# Altium PCB DAF DIP-4 PCB.PcbDoc
Units mm, origin at the board's own origin, x right, y up, seen from the top; angles counter-clockwise.
Board outline 89.92 x 39.31 mm, 2 copper layers (Top Layer, Bottom Layer); 58 components, 46 nets, 241 pads, 56 vias.
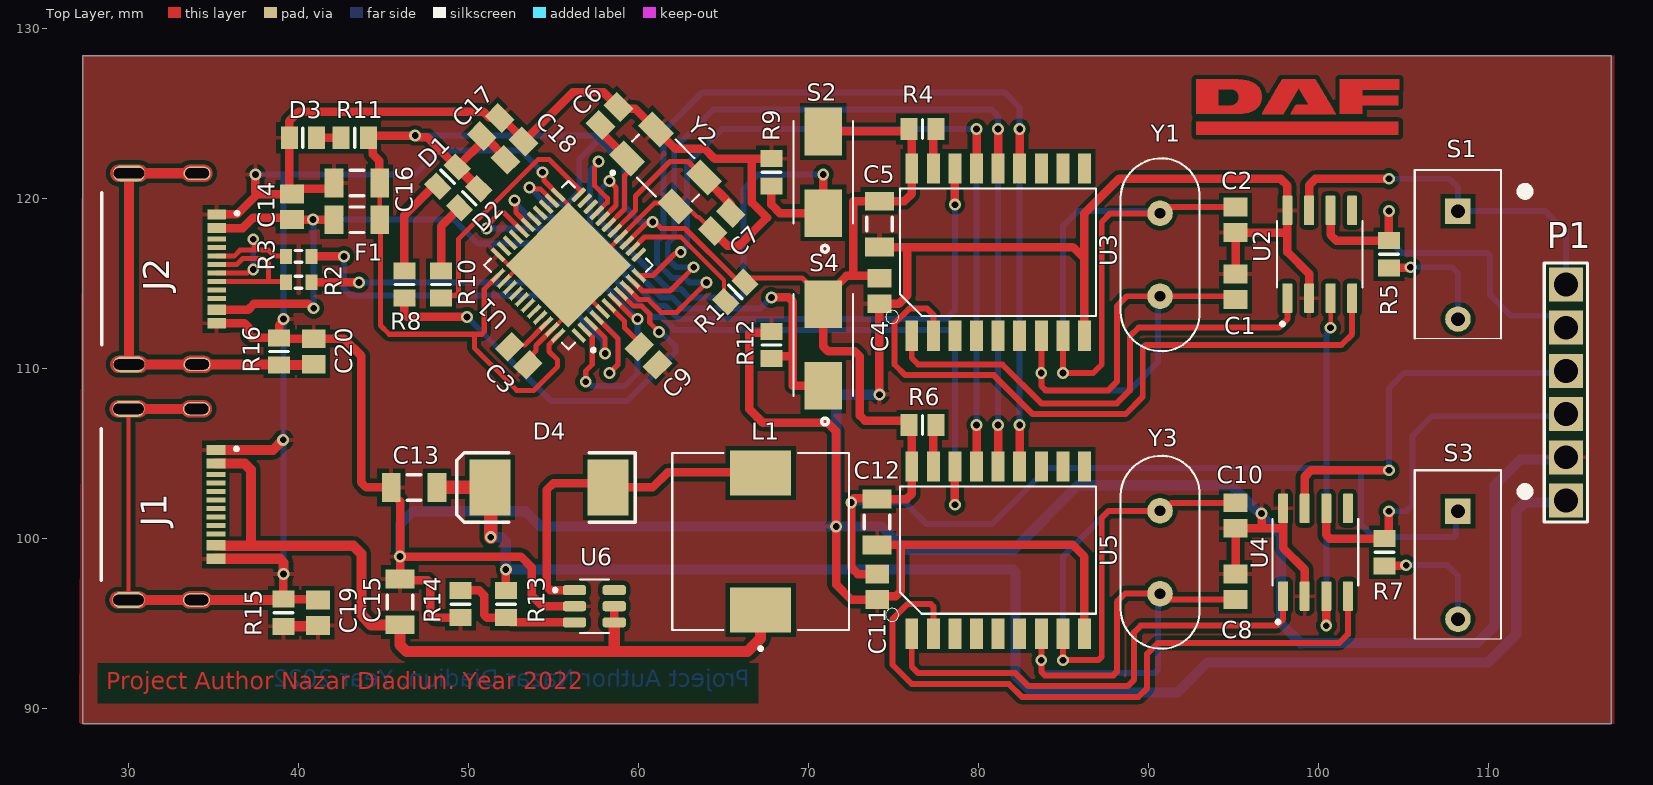
[diagram p0: Top Layer view]
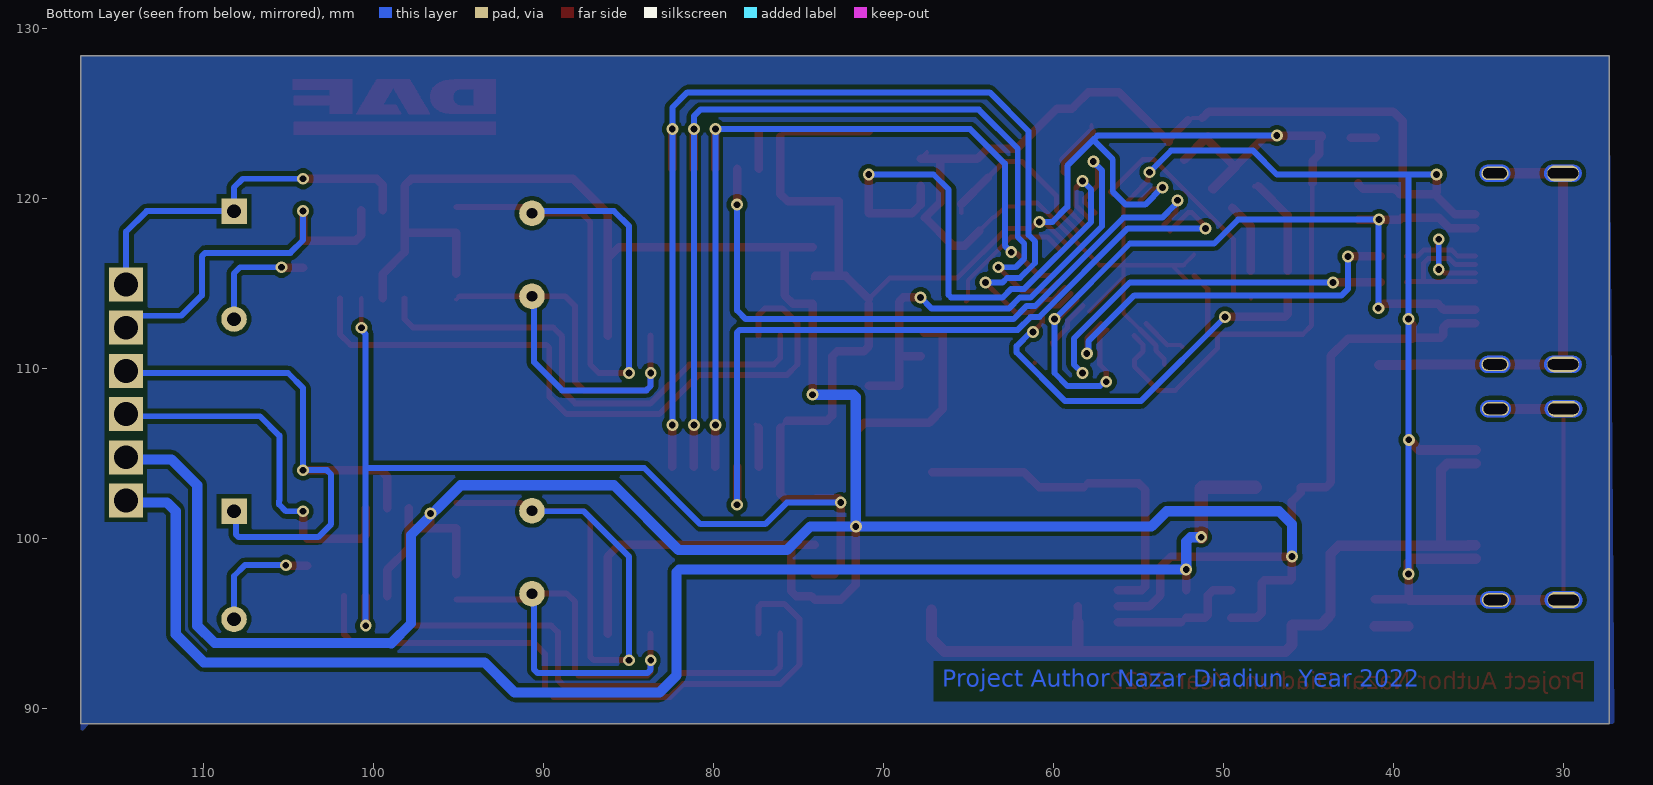
[diagram p1: Bottom Layer view, seen from below]

## Layer stack, top to bottom
Top Solder: solder mask 0.0102, Solder Resist, Dk 3.5
Top Layer: signal copper 0.0356
Dielectric 1: dielectric 0.32, FR-4, Dk 4.8
Bottom Layer: signal copper 0.0356
Bottom Solder: solder mask 0.0102, Solder Resist, Dk 3.5

## Board outline
27.305,89.09 117.221,89.09 117.221,128.397 27.305,128.397

## Design rules (kind name [scope] priority, off if disabled: settings)
Clearance [All] p1: gap=0.254 ignorepadtopadclearanceinfootprint=FALSE except(0: Arc-Hole Track-Hole SMDPad-Hole THPad-Hole Via-Hole Fill-Hole Poly-Hole Region-Hole Text-Hole)
PolygonConnect [All] p1: connectstyle=Relief reliefconductorwidth=0.254 reliefentries=4 polygonreliefangle="90 Angle" airgapwidth=0.254
RoomDefinition Schematic [InComponentClass('Schematic')] p1: confinementstyle=ConfineIn formatcopy=TRUE lockcomponents=FALSE outline 0,0 50.8,0 50.8,25.4 0,25.4
RoutingVias [All] p1: holewidth=0.711 width=1.27 viastyle="Through Hole" minholewidth=0.711 minwidth=1.27 maxholewidth=0.711 maxwidth=1.27
SolderMaskExpansion [All] p1: expansion=0.102 istentingtop=FALSE
Width [All] p1: maxlimit=0.254 minlimit=0.254 preferedwidth=0.254
30 further rules are at their usual default settings.

## Components (designator, comment, footprint, x,y, rotation, side; value= is the part's Value field where it differs from the comment)
C1 "Cap" C0805 95.123,114.808 r270 top value=20pF
C2 "Cap" C0805 95.123,118.745 r90 top value=20pF
C3 "Cap" C0805 52.959,110.744 r135 top value=100nF
C4 "Cap" C0805 74.168,114.554 r270 top value=100nF
C5 "Cap Pol3" C1206 74.168,118.491 r270 top value=10uF
C6 "Cap" C0805 58.293,124.841 r225 top value=20pF
C7 "Cap" C0805 64.897,118.618 r45 top value=20pF
C8 "Cap" C0805 95.123,97.155 r270 top value=20pF
C9 "Cap" C0805 60.579,110.744 r135 top value=1uF
C10 "Cap" C0805 95.123,101.346 r90 top value=20pF
C11 "Cap" C0805 74.041,97.155 r270 top value=100nF
C12 "Cap Pol3" C1206 74.041,100.965 r270 top value=10uF
C13 "Cap" C1206 46.8,103 r0 top value=22uF
C14 "Cap" C0805 39.624,119.507 r270 top value=1uF
C15 "Cap" C1206 45.974,96.266 r270 top value=22uF
C16 "Cap Pol3" C1206 43.434,120.904 r180 top value=10uF
C17 "Cap" C0805 51.308,124.206 r225 top value=1uF
C18 "Cap" C0805 52.705,122.809 r225 top value=100nF
C19 "Cap" C0805 41.148,95.631 r270 top value=100nF
C20 "Cap" C0805 40.894,110.998 r90 top value=100nF
D1 "TX LED" 6-0805_L 48.768,121.285 r45 top
D2 "RX LED" 6-0805_L 50.038,120.015 r45 top
D3 "Power LED" 6-0805_L 40.259,123.571 r180 top
D4 "SS34" SMC 54.737,102.997 r180 top
F1 "500mA" C1206 43.434,118.745 r0 top
J1 "USB Power-only" GCT_USB4505-03-0-A_REVA 30,102 r270 top
J2 "USB 2.0" GCT_USB4505-03-0-A_REVA 30.036,115.856 r270 top
L1 "Inductor" IND_#B966BS-220M=P3 67.183,99.822 r90 top value=22uH
P1 "DAF DIP-4 Connector" HDR1X6 114.554,102.235 r90 top
R1 "Res3" 6-0805_L 65.7,114.5 r225 top value=10k
R2 "Res3" J1-0603 40.005,115.062 r180 top value=22
R3 "Res3" J1-0603 40.005,116.586 r180 top value=22
R4 "Res3" 6-0805_L 76.708,124.079 r0 top value=10k
R5 "Res3" 6-0805_L 104.14,116.713 r270 top value=120
R6 "Res3" 6-0805_L 76.708,106.68 r0 top value=10k
R7 "Res3" 6-0805_L 103.886,99.187 r270 top value=120
R8 "Res3" 6-0805_L 46.228,114.935 r90 top value=330
R9 "Res3" 6-0805_L 67.818,121.539 r270 top value=10k
R10 "Res3" 6-0805_L 48.387,114.935 r90 top value=330
R11 "Res3" 6-0805_L 43.307,123.571 r180 top value=330
R12 "Res3" 6-0805_L 67.818,111.379 r270 top value=10k
R13 "Res3" 6-0805_L 52.197,96.139 r270 top value=47k
R14 "Res3" 6-0805_L 49.53,96.139 r270 top value=1.2k
R15 "Res3" 6-0805_L 39.116,95.631 r90 top value=1M
R16 "Res3" 6-0805_L 38.862,110.998 r270 top value=1M
S1 "Terminating 120Ohm" SW_5161390-1 108.204,116.713 r180 top
S2 "SW-PB" SW_147873-2 70.866,121.539 r90 top
S3 "Terminating 120Ohm" SW_5161390-1 108.204,99.06 r180 top
S4 "SW-PB" SW_147873-2 70.866,111.379 r90 top
U1 "ATMEGA32U4-MU" QFN50P700X700X100-45N 55.88,116.078 r135 top
U2 "TJA1050" SOIC127P600X175-8N 100.076,116.713 r90 top
U3 "MCP2515" SOIC18-1.27-11.5X7.5MM 81.153,116.84 r0 top
U4 "TJA1050" SOIC127P600X175-8N 99.822,99.187 r90 top
U5 "MCP2515" SOIC18-1.27-11.5X7.5MM 81.153,99.314 r0 top
U6 "MT3608" SOT95P280X145-6N 57.404,96.012 r0 top
Y1 "8MHz" XTAL_ECS-135-S-1 90.678,116.686 r90 top
Y2 "16MHz" OSC_ABM3B-16.000MHZ-D-1-X-T 61.595,121.793 r45 top
Y3 "8MHz" XTAL_ECS-135-S-1 90.678,99.187 r90 top

## Footprints (in the part's own frame and the unit in brackets; to place one, negate y for a bottom-side part, rotate by r counter-clockwise, add the part's x,y. Pads: shape width x height; smd on the part's side, far side on the other; paste and mask are expansions set on the pad)
6-0805_L [mm] "Chip Resistor, Body 2.0x1.2mm, IPC High Density"
  rect 1x1.3 smd: 1(-0.8,0) 2(0.8,0)
  silkscreen extent 0,-0.55 0,0.55, body extent -1.07,-0.7 1.07,0.7, height 0.7
C0805 [mm] "Chip Capacitor, Body 2.0x1.3mm, IPC High Density"
  rect 1.1x1.4 smd: 1(-0.75,0) 2(0.75,0)
  body extent -1.1,-0.72 1.1,0.72, height 1.4
C1206 [mm] "Chip Capacitor, Body 3.2x1.6mm, IPC High Density"
  rect 1.1x1.7 smd: 1(-1.35,0) 2(1.35,0)
  silkscreen extent -0.4,-0.75 0.4,0.75, body extent -1.7,-0.9 1.7,0.9, height 1.3
GCT_USB4505-03-0-A_REVA [mm]
  rect 0.6x1.1 smd: A1_B12(-3.2,5.15) A4_B9(-2.4,5.15) B1_A12(3.2,5.15) B4_A9(2.4,5.15)
  rect 0.3x1.1 smd: A5(-1.25,5.15) A6(-0.25,5.15) A7(0.25,5.15) A8(1.25,5.15) B5(1.75,5.15) B6(0.75,5.15) B7(-0.75,5.15) B8(-1.75,5.15)
  oval 0.95x1.9 hole 0.6 slot 1.8 at 90 deg mask+0: S1(-5.62,0) S4(5.62,0)
  oval 0.8x1.6 hole 0.6 slot 1.4 at 90 deg mask+0: S2(5.62,4) S3(-5.62,4)
  Top Layer region: -5.594,4.899 -5.568,4.897 -5.542,4.894 -5.516,4.889 -5.491,4.883 -5.465,4.876 -5.441,4.867 -5.417,4.857 -5.393,4.846 -5.37,4.833 -5.348,4.819 -5.326,4.805 -5.305,4.789 -5.285,4.772 -5.266,4.754 -5.248,4.735 -5.231,4.715 -5.215,4.694 -5.201,4.672 -5.187,4.65 -5.174,4.627 -5.163,4.603 -5.153,4.579 -5.144,4.555 -5.137,4.529 -5.131,4.504 -5.126,4.478 -5.123,4.452 -5.121,4.426 -5.12,4.4 -5.12,3.6 -5.121,3.574 -5.123,3.548 -5.126,3.522 -5.131,3.496 -5.137,3.471 -5.144,3.445 -5.153,3.421 -5.163,3.397 -5.174,3.373 -5.187,3.35 -5.201,3.328 -5.215,3.306 -5.231,3.285 -5.248,3.265 -5.266,3.246 -5.285,3.228 -5.305,3.211 -5.326,3.195 -5.348,3.181 -5.37,3.167 -5.393,3.154 -5.417,3.143 -5.441,3.133 -5.465,3.124 -5.491,3.117 -5.516,3.111 -5.542,3.106 -5.568,3.103 -5.594,3.101 -5.62,3.1 -5.646,3.101 -5.672,3.103 -5.698,3.106 -5.724,3.111 -5.749,3.117 -5.775,3.124 -5.799,3.133 -5.823,3.143 -5.847,3.154 -5.87,3.167 -5.892,3.181 -5.914,3.195 -5.935,3.211 -5.955,3.228 -5.974,3.246 -5.992,3.265 -6.009,3.285 -6.025,3.306 -6.039,3.328 -6.053,3.35 -6.066,3.373 -6.077,3.397 -6.087,3.421 -6.096,3.445 -6.103,3.471 -6.109,3.496 -6.114,3.522 -6.117,3.548 -6.119,3.574 -6.12,3.6 -6.12,4.4 -6.119,4.426 -6.117,4.452 -6.114,4.478 -6.109,4.504 -6.103,4.529 -6.096,4.555 -6.087,4.579 -6.077,4.603 -6.066,4.627 -6.053,4.65 -6.039,4.672 -6.025,4.694 -6.009,4.715 -5.992,4.735 -5.974,4.754 -5.955,4.772 -5.935,4.789 -5.914,4.805 -5.892,4.819 -5.87,4.833 -5.847,4.846 -5.823,4.857 -5.799,4.867 -5.775,4.876 -5.749,4.883 -5.724,4.889 -5.698,4.894 -5.672,4.897 -5.646,4.899 -5.62,4.9
  Top Layer region: 5.646,4.899 5.672,4.897 5.698,4.894 5.724,4.889 5.749,4.883 5.775,4.876 5.799,4.867 5.823,4.857 5.847,4.846 5.87,4.833 5.892,4.819 5.914,4.805 5.935,4.789 5.955,4.772 5.974,4.754 5.992,4.735 6.009,4.715 6.025,4.694 6.039,4.672 6.053,4.65 6.066,4.627 6.077,4.603 6.087,4.579 6.096,4.555 6.103,4.529 6.109,4.504 6.114,4.478 6.117,4.452 6.119,4.426 6.12,4.4 6.12,3.6 6.119,3.574 6.117,3.548 6.114,3.522 6.109,3.496 6.103,3.471 6.096,3.445 6.087,3.421 6.077,3.397 6.066,3.373 6.053,3.35 6.039,3.328 6.025,3.306 6.009,3.285 5.992,3.265 5.974,3.246 5.955,3.228 5.935,3.211 5.914,3.195 5.892,3.181 5.87,3.167 5.847,3.154 5.823,3.143 5.799,3.133 5.775,3.124 5.749,3.117 5.724,3.111 5.698,3.106 5.672,3.103 5.646,3.101 5.62,3.1 5.594,3.101 5.568,3.103 5.542,3.106 5.516,3.111 5.491,3.117 5.465,3.124 5.441,3.133 5.417,3.143 5.393,3.154 5.37,3.167 5.348,3.181 5.326,3.195 5.305,3.211 5.285,3.228 5.266,3.246 5.248,3.265 5.231,3.285 5.215,3.306 5.201,3.328 5.187,3.35 5.174,3.373 5.163,3.397 5.153,3.421 5.144,3.445 5.137,3.471 5.131,3.496 5.126,3.522 5.123,3.548 5.121,3.574 5.12,3.6 5.12,4.4 5.121,4.426 5.123,4.452 5.126,4.478 5.131,4.504 5.137,4.529 5.144,4.555 5.153,4.579 5.163,4.603 5.174,4.627 5.187,4.65 5.201,4.672 5.215,4.694 5.231,4.715 5.248,4.735 5.266,4.754 5.285,4.772 5.305,4.789 5.326,4.805 5.348,4.819 5.37,4.833 5.393,4.846 5.417,4.857 5.441,4.867 5.465,4.876 5.491,4.883 5.516,4.889 5.542,4.894 5.568,4.897 5.594,4.899 5.62,4.9
  Top Layer region: -5.594,1.099 -5.568,1.097 -5.542,1.094 -5.516,1.089 -5.491,1.083 -5.465,1.076 -5.441,1.067 -5.417,1.057 -5.393,1.046 -5.37,1.033 -5.348,1.019 -5.326,1.005 -5.305,0.989 -5.285,0.972 -5.266,0.954 -5.248,0.935 -5.231,0.915 -5.215,0.894 -5.201,0.872 -5.187,0.85 -5.174,0.827 -5.163,0.803 -5.153,0.779 -5.144,0.755 -5.137,0.729 -5.131,0.704 -5.126,0.678 -5.123,0.652 -5.121,0.626 -5.12,0.6 -5.12,-0.6 -5.121,-0.626 -5.123,-0.652 -5.126,-0.678 -5.131,-0.704 -5.137,-0.729 -5.144,-0.755 -5.153,-0.779 -5.163,-0.803 -5.174,-0.827 -5.187,-0.85 -5.201,-0.872 -5.215,-0.894 -5.231,-0.915 -5.248,-0.935 -5.266,-0.954 -5.285,-0.972 -5.305,-0.989 -5.326,-1.005 -5.348,-1.019 -5.37,-1.033 -5.393,-1.046 -5.417,-1.057 -5.441,-1.067 -5.465,-1.076 -5.491,-1.083 -5.516,-1.089 -5.542,-1.094 -5.568,-1.097 -5.594,-1.099 -5.62,-1.1 -5.646,-1.099 -5.672,-1.097 -5.698,-1.094 -5.724,-1.089 -5.749,-1.083 -5.775,-1.076 -5.799,-1.067 -5.823,-1.057 -5.847,-1.046 -5.87,-1.033 -5.892,-1.019 -5.914,-1.005 -5.935,-0.989 -5.955,-0.972 -5.974,-0.954 -5.992,-0.935 -6.009,-0.915 -6.025,-0.894 -6.039,-0.872 -6.053,-0.85 -6.066,-0.827 -6.077,-0.803 -6.087,-0.779 -6.096,-0.755 -6.103,-0.729 -6.109,-0.704 -6.114,-0.678 -6.117,-0.652 -6.119,-0.626 -6.12,-0.6 -6.12,0.6 -6.119,0.626 -6.117,0.652 -6.114,0.678 -6.109,0.704 -6.103,0.729 -6.096,0.755 -6.087,0.779 -6.077,0.803 -6.066,0.827 -6.053,0.85 -6.039,0.872 -6.025,0.894 -6.009,0.915 -5.992,0.935 -5.974,0.954 -5.955,0.972 -5.935,0.989 -5.914,1.005 -5.892,1.019 -5.87,1.033 -5.847,1.046 -5.823,1.057 -5.799,1.067 -5.775,1.076 -5.749,1.083 -5.724,1.089 -5.698,1.094 -5.672,1.097 -5.646,1.099 -5.62,1.1
  Top Layer region: 5.646,1.099 5.672,1.097 5.698,1.094 5.724,1.089 5.749,1.083 5.775,1.076 5.799,1.067 5.823,1.057 5.847,1.046 5.87,1.033 5.892,1.019 5.914,1.005 5.935,0.989 5.955,0.972 5.974,0.954 5.992,0.935 6.009,0.915 6.025,0.894 6.039,0.872 6.053,0.85 6.066,0.827 6.077,0.803 6.087,0.779 6.096,0.755 6.103,0.729 6.109,0.704 6.114,0.678 6.117,0.652 6.119,0.626 6.12,0.6 6.12,-0.6 6.119,-0.626 6.117,-0.652 6.114,-0.678 6.109,-0.704 6.103,-0.729 6.096,-0.755 6.087,-0.779 6.077,-0.803 6.066,-0.827 6.053,-0.85 6.039,-0.872 6.025,-0.894 6.009,-0.915 5.992,-0.935 5.974,-0.954 5.955,-0.972 5.935,-0.989 5.914,-1.005 5.892,-1.019 5.87,-1.033 5.847,-1.046 5.823,-1.057 5.799,-1.067 5.775,-1.076 5.749,-1.083 5.724,-1.089 5.698,-1.094 5.672,-1.097 5.646,-1.099 5.62,-1.1 5.594,-1.099 5.568,-1.097 5.542,-1.094 5.516,-1.089 5.491,-1.083 5.465,-1.076 5.441,-1.067 5.417,-1.057 5.393,-1.046 5.37,-1.033 5.348,-1.019 5.326,-1.005 5.305,-0.989 5.285,-0.972 5.266,-0.954 5.248,-0.935 5.231,-0.915 5.215,-0.894 5.201,-0.872 5.187,-0.85 5.174,-0.827 5.163,-0.803 5.153,-0.779 5.144,-0.755 5.137,-0.729 5.131,-0.704 5.126,-0.678 5.123,-0.652 5.121,-0.626 5.12,-0.6 5.12,0.6 5.121,0.626 5.123,0.652 5.126,0.678 5.131,0.704 5.137,0.729 5.144,0.755 5.153,0.779 5.163,0.803 5.174,0.827 5.187,0.85 5.201,0.872 5.215,0.894 5.231,0.915 5.248,0.935 5.266,0.954 5.285,0.972 5.305,0.989 5.326,1.005 5.348,1.019 5.37,1.033 5.393,1.046 5.417,1.057 5.441,1.067 5.465,1.076 5.491,1.083 5.516,1.089 5.542,1.094 5.568,1.097 5.594,1.099 5.62,1.1
  Bottom Layer region: -5.594,4.899 -5.568,4.897 -5.542,4.894 -5.516,4.889 -5.491,4.883 -5.465,4.876 -5.441,4.867 -5.417,4.857 -5.393,4.846 -5.37,4.833 -5.348,4.819 -5.326,4.805 -5.305,4.789 -5.285,4.772 -5.266,4.754 -5.248,4.735 -5.231,4.715 -5.215,4.694 -5.201,4.672 -5.187,4.65 -5.174,4.627 -5.163,4.603 -5.153,4.579 -5.144,4.555 -5.137,4.529 -5.131,4.504 -5.126,4.478 -5.123,4.452 -5.121,4.426 -5.12,4.4 -5.12,3.6 -5.121,3.574 -5.123,3.548 -5.126,3.522 -5.131,3.496 -5.137,3.471 -5.144,3.445 -5.153,3.421 -5.163,3.397 -5.174,3.373 -5.187,3.35 -5.201,3.328 -5.215,3.306 -5.231,3.285 -5.248,3.265 -5.266,3.246 -5.285,3.228 -5.305,3.211 -5.326,3.195 -5.348,3.181 -5.37,3.167 -5.393,3.154 -5.417,3.143 -5.441,3.133 -5.465,3.124 -5.491,3.117 -5.516,3.111 -5.542,3.106 -5.568,3.103 -5.594,3.101 -5.62,3.1 -5.646,3.101 -5.672,3.103 -5.698,3.106 -5.724,3.111 -5.749,3.117 -5.775,3.124 -5.799,3.133 -5.823,3.143 -5.847,3.154 -5.87,3.167 -5.892,3.181 -5.914,3.195 -5.935,3.211 -5.955,3.228 -5.974,3.246 -5.992,3.265 -6.009,3.285 -6.025,3.306 -6.039,3.328 -6.053,3.35 -6.066,3.373 -6.077,3.397 -6.087,3.421 -6.096,3.445 -6.103,3.471 -6.109,3.496 -6.114,3.522 -6.117,3.548 -6.119,3.574 -6.12,3.6 -6.12,4.4 -6.119,4.426 -6.117,4.452 -6.114,4.478 -6.109,4.504 -6.103,4.529 -6.096,4.555 -6.087,4.579 -6.077,4.603 -6.066,4.627 -6.053,4.65 -6.039,4.672 -6.025,4.694 -6.009,4.715 -5.992,4.735 -5.974,4.754 -5.955,4.772 -5.935,4.789 -5.914,4.805 -5.892,4.819 -5.87,4.833 -5.847,4.846 -5.823,4.857 -5.799,4.867 -5.775,4.876 -5.749,4.883 -5.724,4.889 -5.698,4.894 -5.672,4.897 -5.646,4.899 -5.62,4.9
  Bottom Layer region: 5.646,4.899 5.672,4.897 5.698,4.894 5.724,4.889 5.749,4.883 5.775,4.876 5.799,4.867 5.823,4.857 5.847,4.846 5.87,4.833 5.892,4.819 5.914,4.805 5.935,4.789 5.955,4.772 5.974,4.754 5.992,4.735 6.009,4.715 6.025,4.694 6.039,4.672 6.053,4.65 6.066,4.627 6.077,4.603 6.087,4.579 6.096,4.555 6.103,4.529 6.109,4.504 6.114,4.478 6.117,4.452 6.119,4.426 6.12,4.4 6.12,3.6 6.119,3.574 6.117,3.548 6.114,3.522 6.109,3.496 6.103,3.471 6.096,3.445 6.087,3.421 6.077,3.397 6.066,3.373 6.053,3.35 6.039,3.328 6.025,3.306 6.009,3.285 5.992,3.265 5.974,3.246 5.955,3.228 5.935,3.211 5.914,3.195 5.892,3.181 5.87,3.167 5.847,3.154 5.823,3.143 5.799,3.133 5.775,3.124 5.749,3.117 5.724,3.111 5.698,3.106 5.672,3.103 5.646,3.101 5.62,3.1 5.594,3.101 5.568,3.103 5.542,3.106 5.516,3.111 5.491,3.117 5.465,3.124 5.441,3.133 5.417,3.143 5.393,3.154 5.37,3.167 5.348,3.181 5.326,3.195 5.305,3.211 5.285,3.228 5.266,3.246 5.248,3.265 5.231,3.285 5.215,3.306 5.201,3.328 5.187,3.35 5.174,3.373 5.163,3.397 5.153,3.421 5.144,3.445 5.137,3.471 5.131,3.496 5.126,3.522 5.123,3.548 5.121,3.574 5.12,3.6 5.12,4.4 5.121,4.426 5.123,4.452 5.126,4.478 5.131,4.504 5.137,4.529 5.144,4.555 5.153,4.579 5.163,4.603 5.174,4.627 5.187,4.65 5.201,4.672 5.215,4.694 5.231,4.715 5.248,4.735 5.266,4.754 5.285,4.772 5.305,4.789 5.326,4.805 5.348,4.819 5.37,4.833 5.393,4.846 5.417,4.857 5.441,4.867 5.465,4.876 5.491,4.883 5.516,4.889 5.542,4.894 5.568,4.897 5.594,4.899 5.62,4.9
  Bottom Layer region: 5.646,1.099 5.672,1.097 5.698,1.094 5.724,1.089 5.749,1.083 5.775,1.076 5.799,1.067 5.823,1.057 5.847,1.046 5.87,1.033 5.892,1.019 5.914,1.005 5.935,0.989 5.955,0.972 5.974,0.954 5.992,0.935 6.009,0.915 6.025,0.894 6.039,0.872 6.053,0.85 6.066,0.827 6.077,0.803 6.087,0.779 6.096,0.755 6.103,0.729 6.109,0.704 6.114,0.678 6.117,0.652 6.119,0.626 6.12,0.6 6.12,-0.6 6.119,-0.626 6.117,-0.652 6.114,-0.678 6.109,-0.704 6.103,-0.729 6.096,-0.755 6.087,-0.779 6.077,-0.803 6.066,-0.827 6.053,-0.85 6.039,-0.872 6.025,-0.894 6.009,-0.915 5.992,-0.935 5.974,-0.954 5.955,-0.972 5.935,-0.989 5.914,-1.005 5.892,-1.019 5.87,-1.033 5.847,-1.046 5.823,-1.057 5.799,-1.067 5.775,-1.076 5.749,-1.083 5.724,-1.089 5.698,-1.094 5.672,-1.097 5.646,-1.099 5.62,-1.1 5.594,-1.099 5.568,-1.097 5.542,-1.094 5.516,-1.089 5.491,-1.083 5.465,-1.076 5.441,-1.067 5.417,-1.057 5.393,-1.046 5.37,-1.033 5.348,-1.019 5.326,-1.005 5.305,-0.989 5.285,-0.972 5.266,-0.954 5.248,-0.935 5.231,-0.915 5.215,-0.894 5.201,-0.872 5.187,-0.85 5.174,-0.827 5.163,-0.803 5.153,-0.779 5.144,-0.755 5.137,-0.729 5.131,-0.704 5.126,-0.678 5.123,-0.652 5.121,-0.626 5.12,-0.6 5.12,0.6 5.121,0.626 5.123,0.652 5.126,0.678 5.131,0.704 5.137,0.729 5.144,0.755 5.153,0.779 5.163,0.803 5.174,0.827 5.187,0.85 5.201,0.872 5.215,0.894 5.231,0.915 5.248,0.935 5.266,0.954 5.285,0.972 5.305,0.989 5.326,1.005 5.348,1.019 5.37,1.033 5.393,1.046 5.417,1.057 5.441,1.067 5.465,1.076 5.491,1.083 5.516,1.089 5.542,1.094 5.568,1.097 5.594,1.099 5.62,1.1
  Bottom Layer region: -5.594,1.099 -5.568,1.097 -5.542,1.094 -5.516,1.089 -5.491,1.083 -5.465,1.076 -5.441,1.067 -5.417,1.057 -5.393,1.046 -5.37,1.033 -5.348,1.019 -5.326,1.005 -5.305,0.989 -5.285,0.972 -5.266,0.954 -5.248,0.935 -5.231,0.915 -5.215,0.894 -5.201,0.872 -5.187,0.85 -5.174,0.827 -5.163,0.803 -5.153,0.779 -5.144,0.755 -5.137,0.729 -5.131,0.704 -5.126,0.678 -5.123,0.652 -5.121,0.626 -5.12,0.6 -5.12,-0.6 -5.121,-0.626 -5.123,-0.652 -5.126,-0.678 -5.131,-0.704 -5.137,-0.729 -5.144,-0.755 -5.153,-0.779 -5.163,-0.803 -5.174,-0.827 -5.187,-0.85 -5.201,-0.872 -5.215,-0.894 -5.231,-0.915 -5.248,-0.935 -5.266,-0.954 -5.285,-0.972 -5.305,-0.989 -5.326,-1.005 -5.348,-1.019 -5.37,-1.033 -5.393,-1.046 -5.417,-1.057 -5.441,-1.067 -5.465,-1.076 -5.491,-1.083 -5.516,-1.089 -5.542,-1.094 -5.568,-1.097 -5.594,-1.099 -5.62,-1.1 -5.646,-1.099 -5.672,-1.097 -5.698,-1.094 -5.724,-1.089 -5.749,-1.083 -5.775,-1.076 -5.799,-1.067 -5.823,-1.057 -5.847,-1.046 -5.87,-1.033 -5.892,-1.019 -5.914,-1.005 -5.935,-0.989 -5.955,-0.972 -5.974,-0.954 -5.992,-0.935 -6.009,-0.915 -6.025,-0.894 -6.039,-0.872 -6.053,-0.85 -6.066,-0.827 -6.077,-0.803 -6.087,-0.779 -6.096,-0.755 -6.103,-0.729 -6.109,-0.704 -6.114,-0.678 -6.117,-0.652 -6.119,-0.626 -6.12,-0.6 -6.12,0.6 -6.119,0.626 -6.117,0.652 -6.114,0.678 -6.109,0.704 -6.103,0.729 -6.096,0.755 -6.087,0.779 -6.077,0.803 -6.066,0.827 -6.053,0.85 -6.039,0.872 -6.025,0.894 -6.009,0.915 -5.992,0.935 -5.974,0.954 -5.955,0.972 -5.935,0.989 -5.914,1.005 -5.892,1.019 -5.87,1.033 -5.847,1.046 -5.823,1.057 -5.799,1.067 -5.775,1.076 -5.749,1.083 -5.724,1.089 -5.698,1.094 -5.672,1.097 -5.646,1.099 -5.62,1.1
  silkscreen extent -4.47,-1.6 4.47,6.45, body extent -5.77,-2.1 5.77,5.1, height 2.16
HDR1X6 [mm] "Connector; Header; 6 Position"
  rect 2x2 hole 1.4: 1(0,0) 2(2.54,0) 3(5.08,0) 4(7.62,0) 5(10.16,0) 6(12.7,0)
  silkscreen extent -1.27,-1.27 13.97,1.27
IND_#B966BS-220M=P3 [mm]
  rect 2.65x3.6 smd: 1(-4.025,0) 2(4.025,0)
  silkscreen extent -6.4,-5.2 5.2,5.2
J1-0603 [mm] "Chip Resistor, Body 1.6x0.8mm, IPC High Density"
  rect 0.7x0.9 smd: 1(-0.75,0) 2(0.75,0)
  silkscreen extent -0.2,-0.35 0.2,0.35, body extent -0.85,-0.48 0.85,0.48, height 0.9
OSC_ABM3B-16.000MHZ-D-1-X-T [mm]
  rect 1.2x1.8 smd: 1(-1.2,2) 2(-1.2,-2) 3(1.2,-2) 4(1.2,2)
  silkscreen extent -2.5,-2.5 1.6,2.5, body extent -1.6,-2.5 1.6,2.5, height 1.1
QFN50P700X700X100-45N [mm]
  rrect25% 1.01x0.26 smd: 1(-3.36,2.5) 2(-3.36,2) 3(-3.36,1.5) 4(-3.36,1) 5(-3.36,0.5) 6(-3.36,0) 7(-3.36,-0.5) 8(-3.36,-1) 9(-3.36,-1.5) 10(-3.36,-2) 11(-3.36,-2.5) 23(3.36,-2.5) 24(3.36,-2) 25(3.36,-1.5) 26(3.36,-1) 27(3.36,-0.5) 28(3.36,0) 29(3.36,0.5) 30(3.36,1) 31(3.36,1.5) 32(3.36,2) 33(3.36,2.5)
  rrect25% 0.26x1.01 smd: 12(-2.5,-3.36) 13(-2,-3.36) 14(-1.5,-3.36) 15(-1,-3.36) 16(-0.5,-3.36) 17(0,-3.36) 18(0.5,-3.36) 19(1,-3.36) 20(1.5,-3.36) 21(2,-3.36) 22(2.5,-3.36) 34(2.5,3.36) 35(2,3.36) 36(1.5,3.36) 37(1,3.36) 38(0.5,3.36) 39(0,3.36) 40(-0.5,3.36) 41(-1,3.36) 42(-1.5,3.36) 43(-2,3.36) 44(-2.5,3.36)
  rect 5.2x5.2 smd paste-4: 45(0,0)
  silkscreen extent -4.67,-3.5 3.5,3.5, body extent -3.5,-3.5 3.5,3.5, height 1
SMC [mm] "DO-214-AB/SMC; 2 C-Bend Leads; Body 7.9 x 5.9 mm, inc. leads (LxW)"
  rect 2.4x3.3 smd: 1(-3.475,0) 2(3.475,0)
  silkscreen extent -5.07,-2.05 5.43,2.05
SOIC18-1.27-11.5X7.5MM [mil]
  rect 30x70 smd: 1(-200,-193.5) 2(-150,-193.5) 3(-100,-193.5) 4(-50,-193.5) 5(0,-193.5) 6(50,-193.5) 7(100,-193.5) 8(150,-193.5) 9(200,-193.5) 10(200,193.5) 11(150,193.5) 12(100,193.5) 13(50,193.5) 14(0,193.5) 15(-50,193.5) 16(-100,193.5) 17(-150,193.5) 18(-200,193.5)
  silkscreen extent -260,-165 227,148
SOIC127P600X175-8N [mm]
  rrect25% 1.75x0.59 smd: 1(-2.585,1.905) 2(-2.585,0.635) 3(-2.585,-0.635) 4(-2.585,-1.905) 5(2.585,-1.905) 6(2.585,-0.635) 7(2.585,0.635) 8(2.585,1.905)
  silkscreen extent -4.2,-2.52 1.95,2.52, body extent -3,-2.45 3,2.45, height 1.75
SOT95P280X145-6N [mm]
  rrect50% 1.37x0.59 smd: 1(-1.17,0.95) 2(-1.17,0) 3(-1.17,-0.95) 4(1.17,-0.95) 5(1.17,0) 6(1.17,0.95)
  silkscreen extent -2.4,-1.57 0.85,1.57
SW_147873-2 [mm]
  rect 2.8x2.2 smd: 1(-2.4,0) 2(2.4,0)
  silkscreen extent -4.7,-1.75 3,1.75
SW_5161390-1 [mm]
  rect 1.5x1.5 hole 0.8: 1(0,-2.54)
  round 1.5 hole 0.8: 2(0,3.81)
  silkscreen extent -4.2,-4.95 2.54,4.95
XTAL_ECS-135-S-1 [mm]
  round 1.5 hole 0.63: 1(-2.44,0) 2(2.44,0)
  silkscreen extent -5.68,-2.33 5.68,2.33

## Part data
C1 C2 C3 C4 C6 C7 C8 C9 C10 C11 C13 C14 C15 C17 C18 C19 C20: "Capacitor", LatestRevisionDate=17-Jul-2002, LatestRevisionNote="Re-released for DXP Platform.", PackageDescription="Radial Cap, Thru-Hole; 2 Leads; 0.3 in Pin Spacing", PackageReference=RAD-0.3, Published=8-Jun-2000, Publisher="Altium Limited"
C5 C12 C16: "Polarized Capacitor (Surface Mount)", LatestRevisionDate=29-May-2009, LatestRevisionNote="IPC-7351 Footprint Added.", PackageDescription="Chip Capacitor", PackageReference=C0805, Published=8-Jun-2000, Publisher="Altium Limited"
D1 D2 D3: library part LED1, "Typical RED GaAs LED", LatestRevisionDate=08-Jul-2005, LatestRevisionNote="Mech Layer 1 removed.", PackageDescription="LED; 2 Leads", PackageReference=LED-1, Published=8-Jun-2000, Publisher="Altium Limited"
D4: library part "D Schottky", "Schottky Diode", Code_JEDEC=DO-214-AA, LatestRevisionDate=17-Jul-2002, LatestRevisionNote="Re-released for DXP Platform.", PackageDescription="DO-214-AA/SMB; 2 C-Bend Leads; Body 5.3 x 3.6 mm, inc. leads (LxW)", PackageReference=SMB, Published=8-Jun-2000, Publisher="Altium Limited"
F1: library part "Fuse 1", "Fuse", LatestRevisionDate=17-Jul-2002, LatestRevisionNote="Re-released for DXP Platform.", PackageDescription="Thru-Hole; 2 Leads", PackageReference=PIN-W2/E2.8, Published=8-Jun-2000, Publisher="Altium Limited"
J1 J2: library part USB4505-03-0-A_REVA, "USB-C (USB TYPE-C) USB 2.0 Receptacle Connector 24 (16+8 Dummy) Position Board Edge, Cutout; Surface Mount; Through Hole, Right Angle", Package=None, Availability="In Stock", Check_prices=https://www.snapeda.com/parts/USB4505-03-0-A/Global+Connector+Technology/view-part/?ref=eda, MF="Global Connector Technology", MP=USB4505-03-0-A, Price=None, Purchase-URL=https://pricing.snapeda.com/search/part/USB4505-03-0-A/?ref=eda, SnapEDA_Link=https://www.snapeda.com/parts/USB4505-03-0-A/Global+Connector+Technology/view-part/?ref=snap
P1: library part "Header 6", "Header, 6-Pin", LatestRevisionDate=17-Jul-2002, LatestRevisionNote="Re-released for DXP Platform.", Publisher="Altium Limited"
R1 R2 R3 R4 R5 R6 R7 R8 R9 R10 R11 R12 R13 R14 R15 R16: "Resistor", LatestRevisionDate=29-May-2009, LatestRevisionNote="IPC-7351 Footprint Added.", PackageDescription="Chip Resistor", PackageReference=J1-0603, Published=8-Jun-2000, Publisher="Altium Limited"
S1 S3: library part 5161390-1, "Switch DIP OFF ON SPST 1 Top Slide 25A 50VDC PC Pins 2.54mm Thru-Hole Box/Carton", Package=None, Availability=Unavailable, EU_RoHS_Compliance=Compliant, MF="TE Connectivity", MP=5161390-1, Price=None, SnapEDA_Link=https://www.snapeda.com/parts/5161390-1/TE%20Connectivity%20ALCOSWITCH%20Switches/view-part/1375142/?ref=snap, TE_purchase_URL=https://www.te.com/usa-en/product-5161390-1.html?te_bu=Cor&te_type=disp&te_campaign=seda_glo_cor-seda-global-disp-prtnr-fy19-seda-model-bom-cta_sma-317_1&elqCampaignId=32493
S2 S4: "Switch", LatestRevisionDate=17-Jul-2002, LatestRevisionNote="Re-released for DXP Platform.", PackageDescription="Switch; 2 Leads", PackageReference=SPST-2, Published=24-Mar-1999, Publisher="Altium Limited"
U1: "AVR AVRÂ® ATmega Microcontroller IC 8-Bit 16MHz 32KB (16K x 16) FLASH 44-VQFN (7x7)", Package="VFQFN-44 Microchip Technology / Atmel", Availability=Good, Check_prices=https://www.snapeda.com/parts/ATMEGA32U4-MU/Atmel/view-part/4702009/?ref=eda, MF="Microchip Technology / Atmel", MP=ATMEGA32U4-MU, Price=None, Purchase-URL=https://pricing.snapeda.com/search/part/ATMEGA32U4-MU/?ref=eda, SnapEDA_Link=https://www.snapeda.com/parts/ATMEGA32U4-MU/Atmel/view-part/4702009/?ref=snap
U2 U4: library part TJA1050T/CM,118, "1/1 Transceiver Half CANbus 8-SO", Package="SO-8 NXP Semiconductors", Availability="In Stock", Check_prices=https://www.snapeda.com/parts/TJA1050T/CM,118/NXP%20USA%20Inc./view-part/304529/?ref=eda, MF="NXP USA", MP=TJA1050T/CM,118, Price=None, Purchase-URL=https://pricing.snapeda.com/search/part/TJA1050T/CM,118/?ref=eda, SnapEDA_Link=https://www.snapeda.com/parts/TJA1050T/CM,118/NXP%20USA%20Inc./view-part/304529/?ref=snap
U3 U5: library part INTERFACE-MCP2515T-I/SO(SOIC18), "IC CAN CONTROLLER W/SPI 18SOIC", Package=None, Availability=Unavailable, MF="Microchip Technology", MP=MCP2515T-I/SO, Price=None, SnapEDA_Link=https://www.snapeda.com/parts/MCP2515T-I/SO/Atmel/view-part/4793276/?ref=snap
U6: "High Efficiency 1.2MHz2A Step Up Converter", Package="Package Analog Devices", Availability=Unavailable, MF="Aerosemi Technology Co., Ltd", MP=MT3608, Price=None, SnapEDA_Link=https://www.snapeda.com/parts/MT3608/Aerosemi%20Technology%20Co.%2C%20Ltd/view-part/3218014/?ref=snap
Y1 Y3: library part ECS-135-S-1, Package=None, Availability=Unavailable, MP=ECS-135-S-1, Price=None
Y2: library part ABM3B-16.000MHZ-D-1-X-T, "16 MHz Â±10ppm Crystal 18pF 50 Ohms 4-SMD, No Lead", Package="SMD-4 Abracon LLC", Availability="In Stock", Check_prices=https://www.snapeda.com/parts/ABM3B-16.000MHZ-D-1-X-T/Abracon/view-part/?ref=eda, MF=ABRACON, MP=ABM3B-16.000MHZ-D-1-X-T, Price=None, Purchase-URL=https://pricing.snapeda.com/search/part/ABM3B-16.000MHZ-D-1-X-T/?ref=eda, SnapEDA_Link=https://www.snapeda.com/parts/ABM3B-16.000MHZ-D-1-X-T/Abracon/view-part/?ref=snap
L1: Code_IEC=1005, Code_JEITA=0402, LatestRevisionDate=29-May-2009, LatestRevisionNote="IPC-7351 Footprint Added.", PackageDescription="Chip Inductor", PackageReference=0402-A, Published=8-Jun-2000, Publisher="Altium Limited"

## Via types
v1: diameter 0.7, hole 0.4, Top Layer to Bottom Layer, 56 vias

## Nets (pads, with @x,y where several pads share a name; then routed paths per layer and width w, separated by ;. In a path a pad name is that pad's centre, name@x,y a point inside that pad or via, vN(x,y) a via of type N, cw(c..) or ccw(c..) an arc to the next point about the centre after c; other vN are vias at no path point)
+5: C15.2 J1.A4_B9 J1.B4_A9 L1.1 U6.4 U6.5 | length 48.8
  Top Layer w0.254: 43.7,95.492 43.815,95.377 ; 58.547,93.345 58.574,93.372
  Top Layer w0.5: U6.4 U6.5
  Top Layer w0.6: J1.A4_B9 36.849,104.4 37.2,104.049 37.2,99.573 ; J1.B4_A9@35.177,99.6 35.576,99.6 35.603,99.573 37.2,99.573 ; 43.7,95.492 43.7,99.1 43.227,99.573 37.2,99.573
  Top Layer w0.65: 43.815,95.377 44.276,94.916 C15.2 45.974,93.726 46.355,93.345 58.547,93.345 66.421,93.345 67.183,94.107 L1.1 ; 58.574,93.372 U6.4
GND: C1.1 C2.1 C3.1 C4.2 C5.2 C6.1 C7.1 C8.1 C9.1 C10.1 C11.2 C12.2 C13.1 C14.1 C15.1 C16.2 C17.1 C18.1 C19.2 C20.2 D3.2 J1.A1_B12 J1.B1_A12 J2.A1_B12 J2.B1_A12 P1.2 R9.1 R12.1 R14.2 R15.1 R16.1 U1.5 U1.15 U1.23 U1.33 U1.35 U1.43 U1.45 U2.2 U2.8 U3.9 U4.2 U4.8 U5.9 U6.2 Y2.2 Y2.4 | length 397.7
  Top Layer w0.254: R16.1 R16.1@38.912,111.748 ; R15.1@39.08,94.867 R15.1 ; 39.11,96.437 39.116,96.431 ; v1@39.116,112.802 v1(39.116,112.903) ; C14.1@39.459,120.422 C14.1 ; C19.2@41.098,94.831 C19.2 ; 41.098,96.431 41.148,96.381 ; C15.1 C15.1@46.054,97.536 ; v1@45.974,99.06 v1@46.101,98.933 ; 49.218,121.851 49.334,121.851 ; C17.1@51.24,124.736 C17.1 ; U1.33 52.344,116.078 U1.45@53.052,116.078 ; U1.35 U1.45@53.052,116.078 ; C18.1@53.299,123.403 53.362,123.339 C18.1@53.362,123.212 ; C3.1 C3.1@53.489,110.561 ; v1(54.356,121.539) v1@54.441,121.454 ; U1.43 55.88,113.25 U1.45@55.88,115.371 ; U1.23 55.88,119.614 U1.45 ; U1.5 U1.45@55.88,115.371 ; C6.1 C6.1@58.929,125.265 ; U1.15 57.294,116.078 U1.45 ; Y2.2@61.949,119.742 Y2.2 62.83,119.53 63.454,118.905 63.549,118.905 C7.1 ; R9.1@67.445,122.712 R9.1 ; R12.1@67.616,111.977 R12.1 ; 97.906,100.596 97.917,100.607 ; 98.097,117.995 98.171,118.069 ; U1.45@53.052,116.078 U1.45 ; U1.45@55.88,115.371 U1.45
  Top Layer w0.3: C3.1@53.489,110.561 53.975,111.046 53.975,111.345 U1.43 ; v1@54.441,121.454 54.441,121.052 U1.23 ; U1.15 60.959,119.742 Y2.2@61.949,119.742
  Top Layer w0.5: J2.B1_A12 36.823,112.656 37.084,112.395 37.084,111.947 37.233,111.798 R16.1 38.862,112.548 v1@39.116,112.802 ; J2.A1_B12 36.379,119.056 37.58,120.257 ; v1(37.465,121.412) 37.465,120.372 37.58,120.257 ; R16.1@38.912,111.748 C20.2 42.684,111.748 43.688,110.744 43.688,103.293 43.981,103 C13.1 45.45,102.7 45.974,102.176 v1@45.974,99.06 ; v1(39.116,97.917) 39.116,96.431 41.098,96.431 ; C14.1@39.459,120.422 D3.2 39.459,124.549 40.005,125.095 50.881,125.095 C17.1@51.24,124.736 ; C16.2 42.084,120.857 41.784,120.557 39.924,120.557 C14.1 37.58,120.257 ; C15.1 v1(45.974,98.933) ; C15.1@46.054,97.536 47.603,97.536 47.752,97.387 47.752,95.631 48.044,95.339 R14.2 ; v1@46.101,98.933 53.086,98.933 53.721,98.298 53.721,96.647 54.356,96.012 U6.2 ; C17.1@52.092,124.609 C18.1@53.299,123.403 ; C18.1 56.134,126.238 57.957,126.238 C6.1 ; C6.1@58.929,125.265 59.82,125.265 Y2.4 62.149,122.936 63.881,122.936 64.478,122.339 66.675,122.339 ; C7.1 65.233,117.221 65.913,117.221 67.564,118.872 66.675,119.761 66.675,122.339 ; R12.1@67.616,112.104 66.511,112.104 66.511,110.744 66.511,107.606 67.31,106.807 71.12,106.807 71.628,106.299 v1(71.628,100.711) 71.628,97.282 72.505,96.405 C11.2 74.248,96.612 75.145,96.612 75.438,96.904 75.438,99.615 ; R9.1 66.675,122.339 ; C12.2 75.438,99.615 ; v1(74.168,108.458) C4.2 75.323,113.804 75.819,114.3 75.819,117.141 ; C5.2 75.819,117.141 ; U5.9 86.233,98.933 85.551,99.615 75.438,99.615 ; U3.9 86.233,116.459 ; C8.1 C10.1 96.515,100.596 ; C1.1 C2.1 98.097,117.995 ; v1(96.647,101.473) 96.647,100.728 96.515,100.596 ; 97.906,100.596 96.515,100.596 ; U4.8 97.917,100.607 97.917,99.441 99.187,98.171 U4.2 ; U2.2 99.441,115.57 98.171,116.84 98.171,118.069 U2.8 98.171,120.755 97.768,121.158 88.265,121.158 86.233,119.126 86.233,116.459 ; 75.819,117.141 85.551,117.141 86.233,116.459
  Top Layer w0.6: J1.B1_A12 38.9,98.8 39.116,98.584 v1(39.116,97.917) ; J1.A1_B12 38.5,105.2 v1(39.1,105.8) ; R15.1 C19.2@41.098,94.831
  Bottom Layer w0.35: v1(37.465,121.412) 39.116,121.412 ; v1(39.116,97.917) v1(39.116,112.903) 39.116,121.412 ; v1(54.356,121.539) 53.086,122.809 48.26,122.809 46.863,121.412 39.116,121.412 ; 71.628,108.309 71.777,108.458 ; 98.955,93.831 99.165,93.831 99.187,93.853
  Bottom Layer w0.6: v1(45.974,98.933) 45.974,100.838 46.736,101.6 53.34,101.6 54.229,100.711 v1(71.628,100.711) ; 71.628,108.309 v1(71.628,100.711) ; 71.777,108.458 v1(74.168,108.458) ; 98.955,93.831 97.79,94.996 97.79,100.203 94.869,103.124 85.852,103.124 82.042,99.314 75.692,99.314 74.295,100.711 v1(71.628,100.711) ; 99.187,93.853 109.347,93.853 110.363,94.869 110.363,103.124 111.887,104.648 P1.2@114.554,104.648
NetC1_2: C1.2 U3.7 Y1.1 | length 31.8
  Top Layer w0.254: C1.2@94.935,114.246 C1.2
  Top Layer w0.35: U3.7 v1(83.693,109.728) 83.693,108.966 83.947,108.712 87.63,108.712 88.138,109.22 88.138,113.665 88.719,114.246 Y1.1 C1.2@94.935,114.246
  Bottom Layer w0.35: v1(83.693,109.728) 83.693,108.966 83.947,108.712 88.9,108.712 90.551,110.363 90.551,114.119 Y1.1
NetC2_2: C2.2 U3.8 Y1.2 | length 36.1
  Top Layer w0.254: Y1.2 Y1.2@90.888,119.126
  Top Layer w0.35: U3.8 v1(84.963,109.728) 86.741,109.728 87.249,110.236 87.249,118.618 87.757,119.126 Y1.2 ; Y1.2@90.888,119.126 91.257,119.495 C2.2
  Bottom Layer w0.35: v1(84.963,109.728) 84.963,118.364 85.852,119.253 90.551,119.253 Y1.2
NetC3_2: C3.2 U1.42 | length 2.7
  Top Layer w0.254: C3.2 52.535,111.38 C3.2@53.304,111.38
  Top Layer w0.3: C3.2@53.304,111.38 U1.42
NetC6_2: C6.2 U1.17 Y2.1 | length 7
  Top Layer w0.254: C6.2@57.763,123.928 C6.2 ; Y2.1@59.436,121.586 Y2.1@59.436,122.255
  Top Layer w0.3: U1.17 59.182,119.38 59.182,121.332 Y2.1@59.436,121.586
  Top Layer w0.5: C6.2@57.763,123.928 Y2.1@59.436,122.255
NetC7_2: C7.2 U1.16 Y2.3 | length 10.5
  Top Layer w0.254: C7.2 C7.2@65.427,119.658
  Top Layer w0.3: U1.16 59.817,119.308 59.817,120.142 61.849,122.174 62.911,122.174 Y2.3
  Top Layer w0.5: Y2.3 C7.2@65.427,119.658
NetC8_2: C8.2 U5.7 Y3.1 | length 30.4
  Top Layer w0.254: Y3.1@90.651,96.774 Y3.1 Y3.1@90.888,96.747
  Top Layer w0.35: U5.7 83.693,92.153 83.898,91.948 87.933,91.948 88.138,92.153 88.138,96.266 88.646,96.774 Y3.1@90.651,96.774 ; Y3.1@90.888,96.747 91.23,96.405 C8.2
  Bottom Layer w0.35: v1(83.693,92.837) 83.693,92.28 83.898,92.075 90.346,92.075 90.551,92.28 90.551,96.62 Y3.1
NetC9_2: C9.2 U1.6 | length 3.1
  Top Layer w0.254: U1.6 U1.6@58.271,113.702 ; C9.2@60.049,111.401 C9.2@60.049,111.528
  Top Layer w0.3: U1.6 59.182,112.776 59.182,112.395 C9.2@60.049,111.528
NetC10_2: C10.2 U5.8 Y3.2 | length 33.3
  Top Layer w0.254: Y3.2 Y3.2@90.888,101.627
  Top Layer w0.35: U5.8 v1(84.963,92.837) 87.044,92.837 87.249,93.042 87.249,101.219 87.657,101.627 Y3.2 ; Y3.2@90.888,101.627 91.357,102.096 C10.2
  Bottom Layer w0.35: v1(84.963,92.837) 84.963,98.933 87.63,101.6 90.651,101.6 Y3.2
NetC13_2: C13.2 D4.2 P1.1 R13.1 | length 87.8
  Top Layer w0.254: D4.2@51.259,103 D4.2 D4.2@51.308,102.951
  Top Layer w0.5: R13.1 v1(52.197,98.171)
  Top Layer w0.8: C13.2 D4.2@51.259,103 ; v1(51.308,100.076) D4.2@51.308,102.951
  Bottom Layer w0.35: 82.02,98.171 82.169,98.022
  Bottom Layer w0.6: v1(51.308,100.076) 51.943,100.076 52.197,99.822 v1(52.197,98.171) 82.02,98.171 ; 82.169,98.022 82.169,91.948 83.185,90.932 91.694,90.932 93.472,92.71 109.982,92.71 111.633,94.361 111.633,101.6 112.141,102.108 114.427,102.108 P1.1
NetC19_1: C19.1 J1.S1 J1.S2 J1.S3 J1.S4 R15.2 | length 26.4
  Top Layer w0.254: J1.S4 J1.S1 ; R15.2@39.065,96.38 R15.2 41.098,96.431 C19.1
  Top Layer w0.6: J1.S4 J1.S2 R15.2@39.065,96.38 ; J1.S1 J1.S3
NetC20_1: C20.1 J2.S1 J2.S2 J2.S3 J2.S4 R16.2 | length 26.1
  Top Layer w0.254: R16.2@38.824,110.236 R16.2 ; C20.1@40.844,110.198 C20.1
  Top Layer w0.6: J2.S3 J2.S1 J2.S4 J2.S2 R16.2@38.824,110.236 ; R16.2 C20.1@40.844,110.198
NetD1_1: D1.1 R8.2 | length 6
  Top Layer w0.254: D1.1@47.948,120.719 D1.1
  Top Layer w0.5: R8.2 46.228,118.999 D1.1@47.948,120.719
NetD2_1: D2.1 R10.2 | length 4.2
  Top Layer w0.5: R10.2 48.387,118.364 D2.1
NetD3_1: D3.1 R11.2 | length 1.4
  Top Layer w0.5: D3.1 R11.2
NetD4_1: D4.1 L1.2 U6.1 | length 20.6
  Top Layer w0.254: D4.1@57.958,103.251 D4.1 ; L1.2@67.144,103.886 L1.2
  Top Layer w0.5: U6.1 54.803,96.962 54.61,97.155 54.61,102.87 54.991,103.251 D4.1@57.958,103.251 ; D4.1 60.833,102.997 61.722,103.886 L1.2@67.144,103.886
NetJ2_A6: J2.A6 J2.B6 R2.2 | length 8.5
  Top Layer w0.254: R2.2@39.211,115.106 R2.2
  Top Layer w0.3: J2.B6 38.227,115.106 ; J2.A6 36.35,116.106 36.703,116.459 37.973,116.459 38.227,116.205 38.227,115.106 ; R2.2@39.211,115.106 38.227,115.106
NetJ2_A7: J2.A7 J2.B7 R3.2 | length 9.1
  Top Layer w0.254: 36.999,115.606 37.217,115.824 v1(37.338,115.824) ; v1(37.338,117.602) v1@37.401,117.538 ; R3.2@39.235,116.606 R3.2
  Top Layer w0.3: J2.A7 36.999,115.606 ; J2.B7 36.215,116.606 36.576,116.967 37.401,116.967 ; v1@37.401,117.538 37.401,116.967 ; R3.2@39.235,116.606 38.588,116.606 38.227,116.967 37.401,116.967
  Bottom Layer w0.35: v1(37.338,115.824) v1(37.338,117.602)
NetP1_3: P1.3 R7.1 U4.6 | length 21.9
  Top Layer w0.254: R7.1 R7.1@104.14,100.241
  Top Layer w0.5: U4.6 100.457,100.203 100.673,99.987 R7.1 ; R7.1@104.14,100.241 v1(104.14,101.6)
  Bottom Layer w0.35: v1(104.14,101.6) 105.156,101.6 105.559,102.003 105.559,102.213 105.537,102.235 105.537,106.045 106.68,107.188 P1.3@114.554,107.188
NetP1_4: P1.4 S3.1 U4.7 | length 34.6
  Top Layer w0.5: U4.7 99.187,103.632 99.568,104.013 v1(104.14,104.013)
  Bottom Layer w0.35: S3.1 108.077,101.473 108.077,100.225 107.928,100.076 103.251,100.076 102.489,100.838 102.489,103.759 102.743,104.013 v1(104.14,104.013) 104.14,108.839 105.029,109.728 P1.4@114.554,109.728
NetP1_5: P1.5 R5.1 U2.6 | length 22.3
  Top Layer w0.5: U2.6 100.711,117.856 101.054,117.513 R5.1 v1(104.14,119.253)
  Bottom Layer w0.35: v1(104.14,119.253) 104.14,117.553 104.893,116.8 109.895,116.8 110.1,116.595 110.1,114.3 111.3,113.1 113.849,113.1 P1.5
NetP1_6: P1.6 S1.1 U2.7 | length 22
  Top Layer w0.5: U2.7 99.441,120.777 99.822,121.158 v1(104.14,121.158)
  Bottom Layer w0.35: v1(104.14,121.158) 107.696,121.158 108.204,120.65 S1.1 113.347,119.253 114.554,118.046 P1.6
NetR1_2: R1.2 U1.13 | length 8
  Top Layer w0.254: 62.484,117.729 65.028,115.185 65.028,114.04 R1.2
  Top Layer w0.3: U1.13 60.359,117.729 62.484,117.729
NetR2_1: R2.1 U1.4 | length 25.7
  Top Layer w0.3: U1.4 58.801,111.743 58.801,110.236 v1(58.293,109.728)
  Top Layer w0.5: R2.1 v1(43.561,115.062)
  Bottom Layer w0.35: v1(43.561,115.062) 55.499,115.062 58.801,111.76 58.801,110.236 v1(58.293,109.728)
NetR3_1: R3.1 U1.3 | length 23.3
  Top Layer w0.254: U1.3@57.195,112.637 U1.3
  Top Layer w0.3: U1.3@57.195,112.637 58.039,111.793 v1(58.039,110.871)
  Top Layer w0.5: R3.1 v1(42.672,116.586)
  Bottom Layer w0.35: v1(42.672,116.586) 42.672,114.681 43.053,114.3 55.245,114.3 57.954,111.591 57.954,110.956 v1(58.039,110.871)
NetR4_2: R4.2 U3.17 | length 2.4
  Top Layer w0.254: R4.2@77.343,123.914 R4.2
  Top Layer w0.5: U3.17 R4.2@77.343,123.914
NetR5_2: R5.2 S1.2 | length 6.9
  Top Layer w0.5: R5.2 v1@105.41,115.913
  Bottom Layer w0.35: v1(105.41,115.951) 107.849,115.951 108.204,115.596 S1.2
NetR6_2: R6.2 U5.17 | length 2.5
  Top Layer w0.254: R6.2@77.343,106.515 R6.2
  Top Layer w0.5: U5.17 R6.2@77.343,106.515
NetR7_2: R7.2 S3.2 | length 7.1
  Top Layer w0.5: R7.2 v1@105.156,98.387
  Bottom Layer w0.35: v1(105.156,98.425) 107.569,98.425 108.204,97.79 S3.2
NetR8_1: R8.1 U1.8 | length 25.4
  Top Layer w0.3: U1.8 59.707,113.665 60.198,113.665 60.663,113.2 60.663,112.692 v1(61.214,112.141)
  Top Layer w0.5: R8.1 46.228,113.179 46.377,113.03 v1(49.911,113.03)
  Bottom Layer w0.35: v1(49.911,113.03) 54.864,108.077 59.309,108.077 62.167,110.935 62.167,111.309 61.335,112.141 v1(61.214,112.141)
NetR9_2: R9.2 S2.1 U1.18 | length 33.5
  Top Layer w0.3: U1.18 58.674,119.579 58.674,120.65 v1(58.293,121.031)
  Top Layer w0.5: R9.2 67.818,119.634 68.313,119.139 S2.1 v1(70.866,121.412)
  Bottom Layer w0.35: v1(58.293,121.031) 57.785,120.523 57.785,118.618 61.722,114.681 62.484,114.681 62.992,114.173 66.018,114.173 66.167,114.322 66.167,120.523 67.056,121.412 v1(70.866,121.412)
NetR10_1: R10.1 U1.22 | length 14.5
  Top Layer w0.254: R10.1 R10.1@48.552,114.3 ; U1.22 56.65,120.384 U1.22@56.65,120.388
  Top Layer w0.3: R10.1@48.552,114.3 49.254,114.3 49.403,114.449 49.403,117.602 54.102,122.301 54.737,122.301 U1.22@56.65,120.388
NetR12_2: R12.2 S4.1 U1.19 | length 30
  Top Layer w0.254: v1@57.658,122.056 v1(57.658,122.174) ; 69.05,110.706 69.088,110.744
  Top Layer w0.3: U1.19 58.166,119.778 58.166,120.015 57.404,120.777 57.404,121.802 v1@57.658,122.056
  Top Layer w0.5: R12.2@67.818,110.706 69.05,110.706 ; v1(67.818,114.173) 68.834,114.173 69.088,113.919 69.088,110.744 69.088,108.979 S4.1
  Bottom Layer w0.35: v1(57.658,122.174) 57.658,122.156 57.15,121.648 57.15,118.364 61.341,114.173 61.976,114.173 62.611,113.538 67.183,113.538 v1(67.818,114.173)
NetR13_2: R13.2 R14.1 U6.3 | length 8.2
  Top Layer w0.254: R13.2 R13.2@52.474,95.062
  Top Layer w0.5: R14.1 50.635,96.939 50.927,96.647 50.927,95.504 51.092,95.339 R13.2 ; R13.2@52.474,95.062 U6.3
NetU1_9: U1.9 U3.13 U5.13 | length 63.1
  Top Layer w0.3: U1.9 60.033,114.046 60.579,114.046 61.341,113.284 62.23,113.284 62.992,114.046 v1(64.008,115.062)
  Top Layer w0.5: U5.13 v1(82.423,106.68) ; U3.13 v1(82.423,124.079)
  Bottom Layer w0.35: v1(64.008,115.062) 62.992,115.062 62.738,115.316 61.976,115.316 61.087,116.205 61.087,117.475 61.468,117.856 61.468,123.952 63.754,126.238 81.534,126.238 82.423,125.349 v1(82.423,124.079) v1(82.423,106.68)
NetU1_10: U1.10 U3.14 U5.14 | length 55.8
  Top Layer w0.3: U1.10 60.232,114.554 61.849,114.554 v1(63.246,115.951)
  Top Layer w0.5: U5.14 v1(81.153,106.68) ; U3.14 v1(81.153,124.079)
  Bottom Layer w0.35: v1(63.246,115.951) 62.23,115.951 61.722,116.459 61.722,117.348 62.103,117.729 62.103,122.936 64.389,125.222 80.772,125.222 81.153,124.841 v1(81.153,124.079) v1(81.153,106.68)
NetU1_11: U1.11 U3.15 U5.15 | length 48.4
  Top Layer w0.254: 62.145,116.755 62.399,116.755 v1(62.484,116.84)
  Top Layer w0.3: U1.11 60.86,115.47 62.145,116.755
  Top Layer w0.5: U5.15 v1(79.883,106.68) ; U3.15 v1(79.883,124.079)
  Bottom Layer w0.35: v1(62.484,116.84) 62.865,117.221 62.865,122.047 64.897,124.079 v1(79.883,124.079) v1(79.883,106.68)
NetU1_28: U1.28 U3.16 | length 39.2
  Top Layer w0.254: v1(52.705,119.888) v1@52.79,119.803
  Top Layer w0.3: v1@52.79,119.803 52.79,119.168 U1.28
  Top Layer w0.5: v1(78.613,119.634) U3.16
  Bottom Layer w0.35: v1(52.705,119.888) 52.705,119.793 52.88,119.618 52.88,119.592 53.6,118.872 55.88,118.872 61.087,113.665 61.595,113.665 62.357,112.903 78.105,112.903 78.613,113.411 v1(78.613,119.634)
NetU1_29: U1.29 U5.16 | length 45.5
  Top Layer w0.254: v1(51.054,118.237) v1@51.054,118.358
  Top Layer w0.3: v1@51.054,118.358 51.868,119.172 52.079,119.172 U1.29
  Top Layer w0.5: v1(78.613,101.981) U5.16
  Bottom Layer w0.35: v1(51.054,118.237) 55.626,118.237 60.833,113.03 61.341,113.03 62.103,112.268 78.464,112.268 78.613,112.119 v1(78.613,101.981)
NetU2_1: U2.1 U3.1 | length 29.6
  Top Layer w0.35: U3.1 76.073,110.617 76.454,110.236 81.407,110.236 83.693,107.95 88.138,107.95 88.9,108.712 88.9,111.887 89.408,112.395 97.663,112.395 98.171,112.903 U2.1
NetU2_4: U2.4 U3.2 | length 40.3
  Top Layer w0.35: U3.2 77.343,113.157 76.962,113.538 75.946,113.538 75.057,112.649 75.057,110.236 75.692,109.601 80.899,109.601 83.185,107.315 88.646,107.315 89.662,108.331 89.662,111.23 89.811,111.379 101.346,111.379 101.981,112.014 U2.4
NetU4_1: U4.1 U5.1 | length 28.9
  Top Layer w0.35: U5.1 76.073,92.456 76.454,92.075 82.169,92.075 82.931,91.313 88.773,91.313 89.154,91.694 89.154,94.488 89.535,94.869 97.536,94.869 97.917,95.25 U4.1
NetU4_4: U4.4 U5.2 | length 39.6
  Top Layer w0.35: U5.2 77.343,95.99 77.194,96.139 75.819,96.139 74.93,95.25 74.93,92.583 76.073,91.44 81.788,91.44 82.55,90.678 89.408,90.678 89.916,91.186 89.916,93.218 90.551,93.853 101.219,93.853 101.727,94.361 U4.4
UVCC: C14.2 F1.1 J2.A4_B9 J2.B4_A9 U1.2 U1.7 | length 51.8
  Top Layer w0.254: C14.2@39.509,118.872 C14.2 ; F1.1@42.072,118.757 F1.1 ; U1.2 56.842,112.284 57.277,111.848 ; v1@59.677,112.988 59.859,112.988 v1(59.944,112.903)
  Top Layer w0.3: v1(56.896,109.22) 56.896,109.855 57.277,110.236 57.277,111.848 ; U1.7 v1@59.677,112.988
  Top Layer w0.5: J2.B4_A9 37.041,113.456 37.377,113.792 40.586,113.792 40.84,113.538 v1(40.894,113.538) ; J2.A4_B9 36.722,118.256 37.338,118.872 C14.2@39.509,118.872 ; C14.2 v1(40.848,118.757) F1.1@42.072,118.757
  Bottom Layer w0.35: v1(40.894,113.538) 40.871,113.561 40.871,118.734 v1(40.848,118.757) 49.137,118.757 50.546,117.348 55.499,117.348 v1(59.944,112.903) 59.944,109.728 59.182,108.966 57.268,108.966 57.014,109.22 v1(56.896,109.22)
VCC: C4.1 C5.1 C11.1 C12.1 C16.1 C17.2 C18.2 D1.2 D2.2 F1.2 R1.1 R4.1 R6.1 R11.1 S2.2 S4.2 U1.14 U1.24 U1.34 U1.44 U2.3 U3.18 U4.3 U5.18 | length 180.6
  Top Layer w0.254: R11.1@44.234,123.698 R11.1 44.357,123.321 R11.1@44.48,123.198 ; C16.1 F1.2 F1.2@44.831,118.698 ; v1(46.863,123.698) v1@46.948,123.613 ; C17.2@50.926,123.443 C17.2@50.926,123.655 ; C18.2@52.302,122.152 C18.2@52.302,122.279 ; v1(53.594,120.65) v1@53.679,120.565 ; 60.456,118.533 60.748,118.533 v1(60.833,118.618) v1@60.954,118.618 ; S4.2 S4.2@70.866,114.079 ; v1(72.517,102.108) 72.517,102.213 v1@72.666,102.362 ; C12.1@73.994,102.362 C12.1 ; C4.1@74.029,115.443 C4.1 ; R6.1@75.654,106.934 R6.1 R6.1@76.073,106.515 ; R4.1@75.768,123.939 R4.1@76.073,123.634 ; v1(100.711,112.395) U2.3
  Top Layer w0.3: F1.2@44.831,118.698 44.831,112.522 45.339,112.014 50.353,112.014 ; U1.34 50.927,114.661 50.927,112.163 50.778,112.014 50.353,112.014 ; v1@53.679,120.565 54.222,120.565 U1.24 ; U1.44 54.737,111.399 54.737,110.998 55.245,110.49 55.245,110.109 53.848,108.712 52.832,108.712 50.353,111.191 50.353,112.014 ; U1.14 60.456,118.533 ; v1@60.954,118.618 61.335,118.237 62.738,118.237 65.659,115.316 69.629,115.316 S4.2@70.866,114.079
  Top Layer w0.5: R11.1@44.234,123.698 v1(46.863,123.698) ; R11.1@44.357,123.321 44.357,122.612 44.758,122.211 44.758,120.93 C16.1 ; v1@46.948,123.613 47.572,123.613 D1.2 C17.2@50.926,123.443 ; C17.2@50.926,123.655 C18.2@52.302,122.279 ; S4.2 70.866,111.291 71.159,110.998 72.732,110.998 73.025,110.705 73.025,107.227 73.318,106.934 R6.1@75.654,106.934 ; S4.2@70.866,114.079 72.23,115.443 72.644,115.443 ; S2.2 R4.1@75.768,123.939 ; v1(72.517,102.108) 72.517,98.298 72.91,97.905 C11.1 ; v1@72.666,102.362 C12.1@73.994,102.362 ; C4.1@74.029,115.443 72.644,115.443 ; C12.1 75.772,102.315 76.073,102.616 U5.18 R6.1@76.073,106.515 ; R4.1@76.073,123.634 U3.18 76.073,120.269 75.645,119.841 C5.1 72.644,119.841 72.644,115.443 ; v1(100.457,94.869) U4.3
  Top Layer w0.6: D1.2 D2.2
  Bottom Layer w0.35: v1(46.863,123.698) 57.404,123.698 57.658,123.444 ; v1(53.594,120.65) 54.61,119.634 55.753,119.634 56.515,120.396 56.515,122.301 57.658,123.444 ; v1(60.833,118.618) 60.071,118.618 59.182,119.507 59.182,121.92 57.658,123.444 ; v1(72.517,102.108) 75.692,102.108 76.962,100.838 80.772,100.838 84.074,104.14 100.457,104.14 ; v1(100.457,94.869) 100.457,104.14 ; v1(100.711,112.395) 100.711,112.274 100.457,112.02 100.457,104.14
pads on no net: J1.A5 J1.A6 J1.A7 J1.A8 J1.B5 J1.B6 J1.B7 J1.B8 J2.A5 J2.A8 J2.B5 J2.B8 U1.1 U1.12 U1.20 U1.21 U1.25 U1.26 U1.27 U1.30 U1.31 U1.32 U1.36 U1.37 U1.38 U1.39 U1.40 U1.41 U2.5 U3.3 U3.4 U3.5 U3.6 U3.10 U3.11 U3.12 U4.5 U5.3 U5.4 U5.5 U5.6 U5.10 U5.11 U5.12 U6.6

## Polygon pours and split planes (outlines as drawn)
no net on Bottom Layer "NONET_L02_P000" (solid, pour order 0): 27.305,128.397 117.221,128.397 117.221,88.579 116.709,89.09 27.011,89.09
GND on Top Layer "GND_L01_P001" (solid, pour order 1): 27.305,128.397 117.4,128.397 117.4,89.09 27.112,89.09

## Other copper
Top Layer:
  region: 485 vertices and 0 holes, not listed, extent 96.68,124.964 101.016,127
  region: 101.859,124.981 101.262,124.981 101.262,127 104.738,127 104.738,126.403 102.579,126.403 102.579,126.052 104.703,126.052 104.703,125.473 102.579,125.473 102.579,124.981 101.876,124.981
  region: 99.19,124.507 104.703,124.507 104.703,123.735 92.8,123.735 92.8,124.507 99.173,124.507
  region: 147 vertices and 1 holes, not listed, extent 92.8,124.981 96.662,127
  text "Project Author Nazar Diadiun. Year 2022" at 28.702,91.138 h1
Bottom Layer:
  text "Project Author Nazar Diadiun. Year 2022" at 66.548,91.265 h1